# Altium PCB TiltPCB_CP1.PcbDoc
Units mm, origin at the board's own origin, x right, y up, seen from the top; angles counter-clockwise.
Board outline 82.66 x 56.61 mm, 2 copper layers (Top Layer, Bottom Layer); 75 components, 69 nets, 293 pads, 22 vias.
Unrouted connection lines stored in the file: 72.
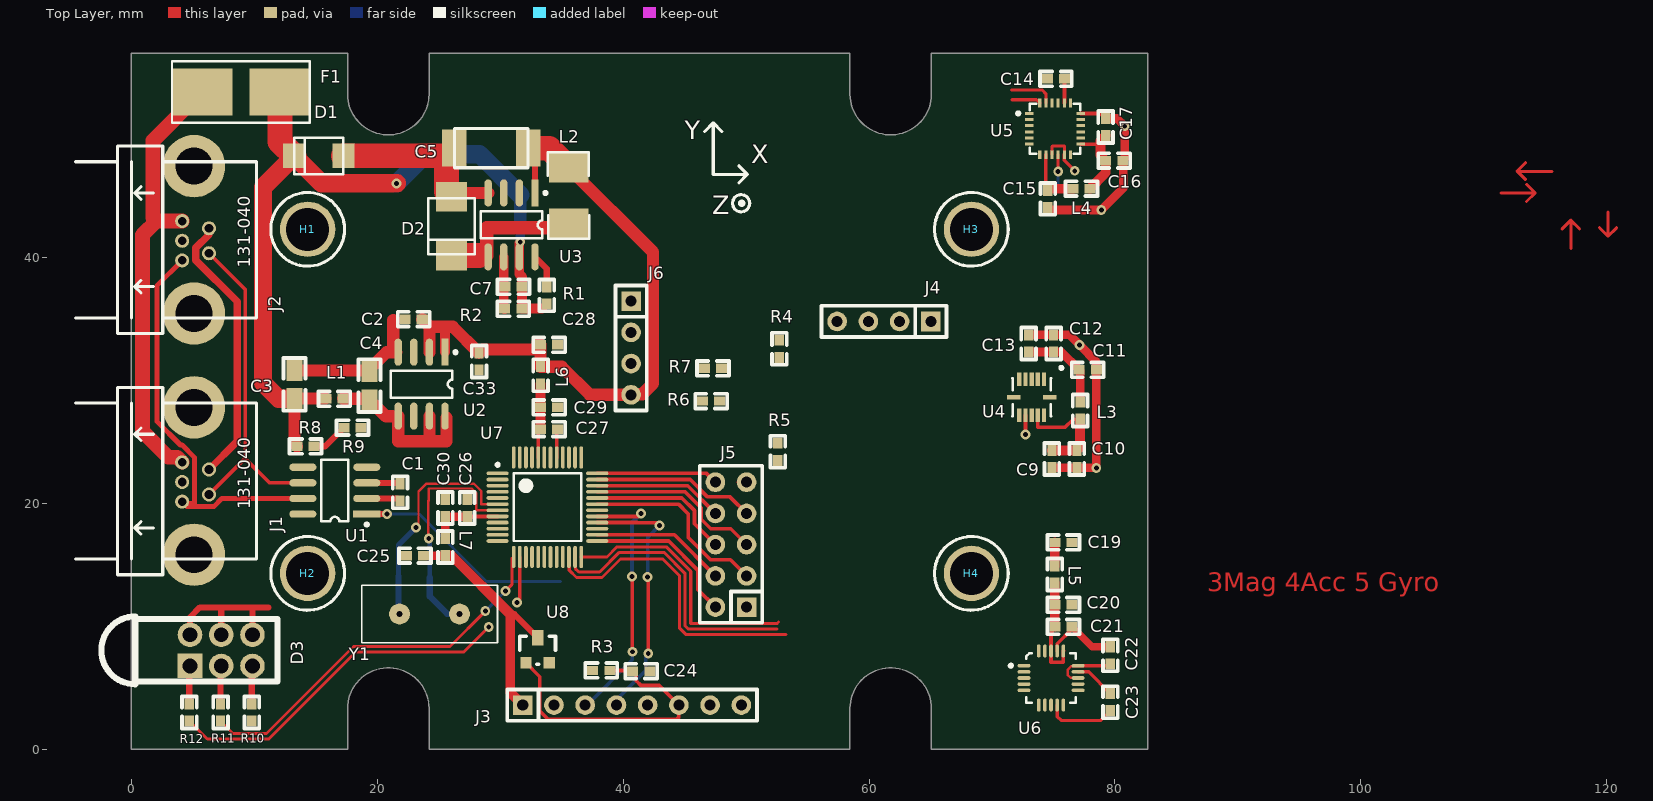
[diagram p0: Top Layer view]
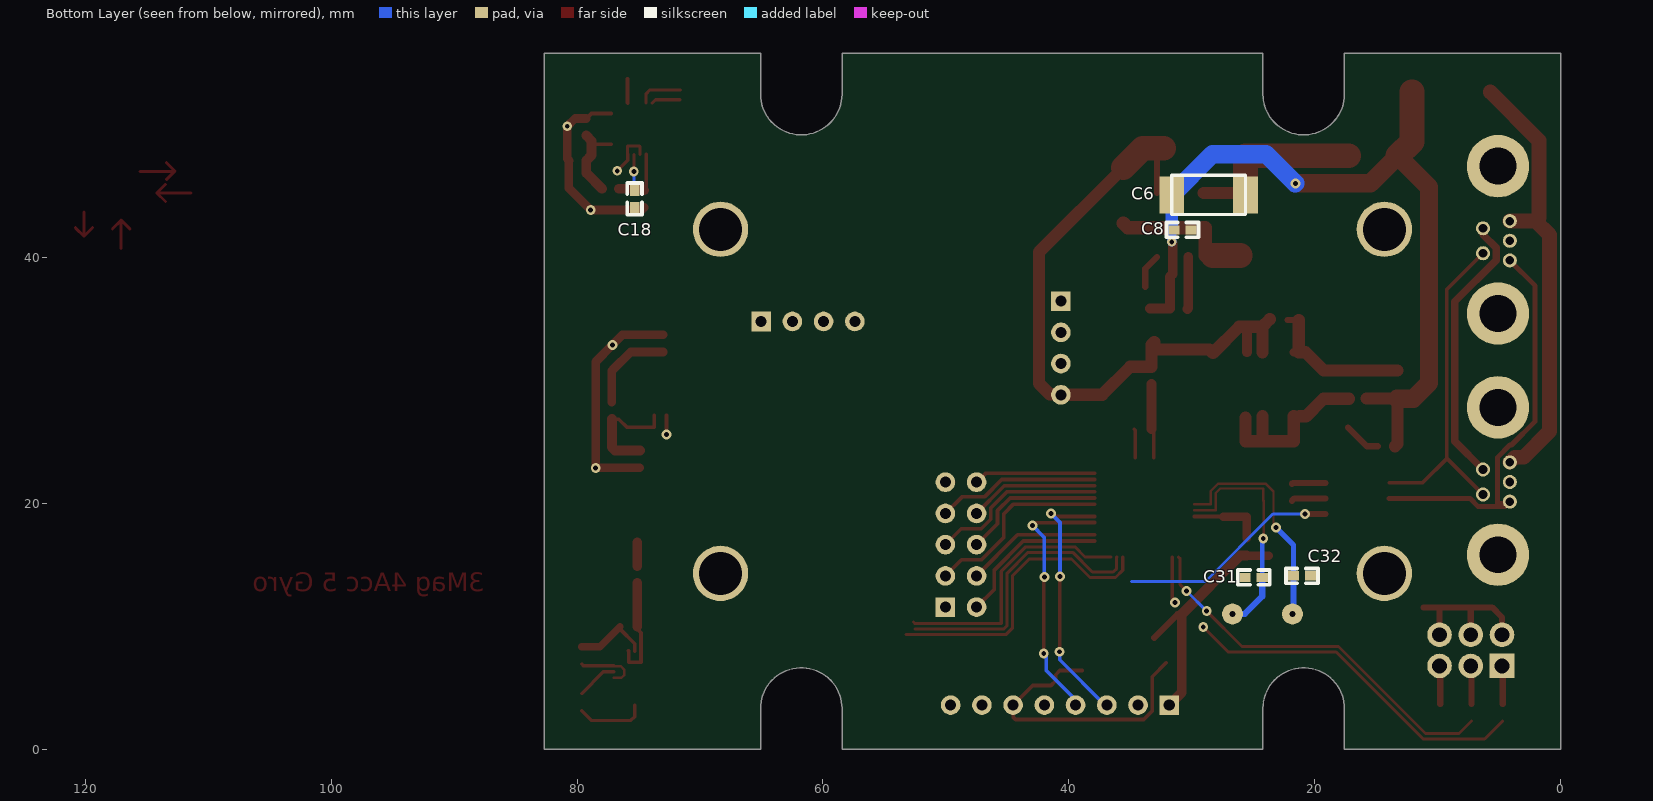
[diagram p1: Bottom Layer view, seen from below]

## Layer stack, top to bottom
Top Layer: signal copper 0.0356
Dielectric: dielectric 0.32, FR-4, Dk 4.8
Bottom Layer: signal copper 0.0356

## Board outline
17.575,0 17.575,3.31 cw(c20.89,3.31) 24.205,3.31 24.205,0 58.445,0 58.445,3.31 cw(c61.76,3.31) 65.075,3.31 65.075,0 65.08,-0.005 82.655,-0.005 82.655,56.605 82.65,56.6 65.075,56.6 65.075,53.29 cw(c61.76,53.29) 58.445,53.29 58.445,56.6 24.205,56.6 24.205,53.29 cw(c20.89,53.29) 17.575,53.29 17.575,56.605 -0.005,56.605 -0.005,-0.005 0,0

## Design rules (kind name [scope] priority, off if disabled: settings)
Clearance [All] p1: gap=0.2
HoleSize [All] p1 off: absolutevalues=TRUE maxlimit=5 minlimit=0.3 maxpercent=80.000 minpercent=20.000
PolygonConnect [All] p1: connectstyle=Relief reliefconductorwidth=0.254 reliefentries=4 polygonreliefangle="90 Angle"
RoutingVias [All] p1: holewidth=0.4 width=0.8 viastyle="Through Hole" minholewidth=0.4 minwidth=0.8 maxholewidth=0.4 maxwidth=0.8
SilkToSilkClearance [All] p1: silktosilkclearance=0.1
SilkscreenOverComponentPads [All] p1 off: minsilkscreentomaskgap=0.1
SolderMaskExpansion [All] p1: expansion=0.102
TestPointUsage [All] p1: valid=0 allowmultiple=FALSE
Testpoint [All] p1: side=15 testpointundercomponent=TRUE minsize=1.016 maxsize=2.54 preferedsize=1.524 minholesize=0 maxholesize=1.016 preferedholesize=0.813 testpointgrid=0.025 style=1023 order=0-112345678
Width [All] p1: maxlimit=10 minlimit=0.2 preferedwidth=0.254 minimp=50.000000 maximp=50.000000 favimp=50.000000
21 further rules are at their usual default settings.

## Classes and differential pairs
component class U_3V-Switcher-50mA: C5 C6 C7 C8 D2 L2 R1 R2 U3
component class TopLevel: D3 H1 H2 H3 H4 J4 J5 J6 R4 R5 R6 R7 R8 R9 R10 R11 R12
component class PWR: C1 C2 C3 C4 D1 F1 J1 J2 L1 U1 U2
component class LPC: C24 C25 C26 C27 C28 C29 C30 C31 C32 C33 J3 L6 L7 R3 U7 U8 Y1
component class AccGryro: C9 C10 C11 C12 C13 C14 C15 C16 C17 C18 C19 C20 C21 C22 C23 L3 L4 L5 U4 U5 U6

## Components (designator, comment, footprint, x,y, rotation, side; value= is the part's Value field where it differs from the comment)
C1 "100nF" 0603 21.844,20.193 r90 top
C2 "2.2u" 0603 22.25,34.976 r0 top
C3 "10u" 0805 13.259,28.524 r90 top
C4 "10u" 0805 19.355,28.423 r90 top
C5 "4u7 35V" MCCT-CASEC 32.258,48.895 r180 top
C6 "4u7 35V" MCCT-CASEC 31.623,45.085 r180 bottom
C7 "1n" 0603 31.775,37.617 r180 top
C8 "100nF" 0603 31.445,42.24 r180 bottom
C9 "10u" 0603 74.879,24.308 r270 top
C10 "0.1u" 0603 76.911,24.308 r270 top
C11 "1u" 0603 77.089,30.861 r0 top
C12 "100nF" 0603 75.006,32.309 r90 top
C13 "CAP" 0603 72.974,32.309 r90 top
C14 "2.2n 50V" 0603 75.895,54.534 r180 top
C15 "0.1u" 0603 74.549,45.466 r270 top
C16 "100nF" 0603 79.248,47.879 r0 top
C17 "10nF" 0603 79.248,49.911 r90 top
C18 "100n" 0603 75.311,45.466 r270 bottom
C19 "0.1u" 0603 75.108,16.815 r0 top
C20 "100nF" 0603 75.108,11.735 r0 top
C21 "10nF" 0603 75.108,9.957 r0 top
C22 "4.7u" 0603 79.629,6.934 r90 top
C23 "0.22u" 0603 79.629,4.521 r270 top
C24 "10nF" 0603 40.767,6.35 r0 top
C25 "1u" 0603 22.352,15.748 r0 top
C26 "10n" 0603 27.305,20.32 r270 top
C27 "10n" 0603 33.274,26.035 r0 top
C28 "1u" 0603 33.274,32.893 r0 top
C29 "100nF" 0603 33.274,27.813 r0 top
C30 "100nF" 0603 25.527,20.32 r270 top
C31 "18pF" 0603 24.257,13.97 r0 bottom
C32 "18pF" 0603 21.717,14.097 r180 bottom
C33 "100nF" 0603 28.27,32.233 r270 top
D1 "12V Transient Suppressor" SMA 15.24,48.26 r180 top
D2 "MBRS130" SMB 26.035,42.545 r270 top
D3 "1882-2781" LED_TRILEVEL 4.755,6.77 r90 top
F1 "125mA/3A" LITTELFUSE-154 8.89,53.467 r0 top
H1 "HOLE" M2.5 14.326,42.291 r0 top
H2 "HOLE" M2.5 14.326,14.3 r0 top
H3 "HOLE" M2.5 68.326,42.291 r0 top
H4 "HOLE" M2.5 68.326,14.3 r0 top
J1 "CON5-S" TRIAD5F 6.3,22.75 r90 top
J2 "CON5-S" TRIAD5F 6.3,42.375 r90 top
J3 "LPC SWD Connector" IDC8 31.826,3.581 r0 top
J4 "Generic_Header_4P" IDC4 65.024,34.798 r180 top
J5 "CON10" IDC10 50.038,11.557 r90 top
J6 "UART_Header" IDC4 40.64,36.449 r270 top
L1 "Ferrite" 0603 15.799,28.499 r0 top
L2 "330uH" 1812 35.56,42.799 r90 top
L3 "Ferrite" 0603 77.165,26.848 r90 top
L4 "Ferrite" 0603 76.581,45.593 r0 top
L5 "Ferrite" 0603 75.108,14.91 r270 top
L6 "Ferrite" 0603 33.274,29.718 r90 top
L7 "Ferrite" 0603 25.527,15.748 r90 top
R1 "100k" 0603 33.782,37.617 r270 top
R2 "1R2" 0603 31.75,35.814 r180 top
R3 "10k" 0603 38.913,6.401 r180 top
R4 "4K7" 0603 52.705,31.877 r90 top
R5 "4K7" 0603 52.578,24.892 r270 top
R6 "0R" 0603 46.457,28.321 r0 top
R7 "0R" 0603 46.609,30.988 r0 top
R8 "100K" 0603 14.859,24.638 r180 top
R9 "20K" 0603 18.669,26.162 r180 top
R10 "1K" 0603 9.779,3.683 r270 top
R11 "1K" 0603 7.239,3.683 r270 top
R12 "1K" 0603 4.699,3.683 r270 top
U1 "SN65HVD232" SO8 16.535,21.031 r90 top
U2 "MIC5200" SO8 23.597,29.693 r180 top
U3 "LTC1474" SO8 30.912,42.647 r180 top
U4 "BMA180" "LGA - BMA180" 73.228,28.626 r180 top
U5 "ITG-3200 Gyro" "ITG-3200 - QFN 24 Pin" 75.133,50.47 r0 top
U6 "HMC5843" "HMC5843 - LPCC 20 Pin" 74.803,5.791 r0 top
U7 "LPC11C14" TSQFP50P900X900-48N 33.833,19.685 r0 top
U8 "XC61CN2002MR" SOT23(3) 32.08,7.036 r0 top
Y1 "12 MHz" HC49/4H 18.72,10.998 r0 top

## Footprints (in the part's own frame and the unit in brackets; to place one, negate y for a bottom-side part, rotate by r counter-clockwise, add the part's x,y. Pads: shape width x height; smd on the part's side, far side on the other; paste and mask are expansions set on the pad)
0603 [mil]
  rect 35.43x30 smd: 1(0,0) 2(55,0)
  silkscreen extent -24,-24 79,24
0805 [mm]
  rect 1.7x1.27 smd: 1(0,0) 2(2.286,0)
  silkscreen extent -1,-0.9 3.3,0.9
1812 [mm]
  rect 2.4x3.2 smd: 1(0,0) 2(4.5,0)
  silkscreen extent -1.27,-1.66 5.77,1.7
HC49/4H [mm]
  round 1.7 hole 0.5: 1(3.085,0) 2(7.965,0)
  silkscreen extent 0,-2.35 11.05,2.35
"HMC5843 - LPCC 20 Pin" [mm] "HMC5843 - LPCC 20 Pin"
  oval 1.05x0.3 smd: 1(-2.2,1) 2(-2.2,0.5) 3(-2.2,0) 4(-2.2,-0.5) 5(-2.2,-1) 11(2.2,-1) 12(2.2,-0.5) 13(2.2,0) 14(2.2,0.5) 15(2.2,1)
  oval 0.3x1.05 smd: 6(-1,-2.2) 7(-0.5,-2.2) 8(0,-2.2) 9(0.5,-2.2) 10(1,-2.2) 16(1,2.2) 17(0.5,2.2) 18(0,2.2) 19(-0.5,2.2) 20(-1,2.2)
  silkscreen extent -3.4,-2 2,2, body extent -2,-2 2,2, height 1.46
IDC4 [mm]
  rect 1.6x1.6 hole 0.9: 1(0,0)
  round 1.6 hole 0.9: 2(2.54,0) 3(5.08,0) 4(7.62,0)
  silkscreen extent -1.27,-1.27 8.89,1.27
IDC8 [mm]
  rect 1.6x1.6 hole 0.9: 1(0,0)
  round 1.6 hole 0.9: 2(2.54,0) 3(5.08,0) 4(7.62,0) 5(10.16,0) 6(12.7,0) 7(15.24,0) 8(17.78,0)
  silkscreen extent -1.27,-1.27 19.05,1.27
IDC10 [mm]
  rect 1.6x1.6 hole 0.9: 1(0,0)
  round 1.6 hole 0.9: 2(0,2.54) 3(2.54,0) 4(2.54,2.54) 5(5.08,0) 6(5.08,2.54) 7(7.62,0) 8(7.62,2.54) 9(10.16,0) 10(10.16,2.54)
  silkscreen extent -1.27,-1.27 11.5,3.81
"ITG-3200 - QFN 24 Pin" [mm] "QFN, 24-Leads, Body 4.1x4.1mm (max), Pitch 0.50mm, IPC Low Density"
  rect 0.7x0.25 smd: 1(-2.1,1.25) 2(-2.1,0.75) 3(-2.1,0.25) 4(-2.1,-0.25) 5(-2.1,-0.75) 6(-2.1,-1.25) 13(2.1,-1.25) 14(2.1,-0.75) 15(2.1,-0.25) 16(2.1,0.25) 17(2.1,0.75) 18(2.1,1.25)
  rect 0.25x0.7 smd: 7(-1.25,-2.1) 8(-0.75,-2.1) 9(-0.25,-2.1) 10(0.25,-2.1) 11(0.75,-2.1) 12(1.25,-2.1) 19(1.25,2.1) 20(0.75,2.1) 21(0.25,2.1) 22(-0.25,2.1) 23(-0.75,2.1) 24(-1.25,2.1)
  silkscreen extent -3.12,-2.05 2.05,2.05, body extent -2.05,-2.05 2.05,2.05, height 0.95
LED_TRILEVEL [mm]
  rect 2x2 hole 1.2: 1(0,0)
  round 2 hole 1.2: 2(0,-2.54) 3(0,-5.08) 4(2.54,-5.08) 5(2.54,-2.54) 6(2.54,0)
  silkscreen extent -1.49,-7.11 4.03,7.21
"LGA - BMA180" [mm] "LCC, 12-Pins, Body 3.1x3.1mm (max), Pitch 0.50mm, IPC High Density"
  rect 0.35x1.1 smd: 1(-1,-1.475) 2(-0.5,-1.475) 3(0,-1.475) 4(0.5,-1.475) 5(1,-1.475) 7(1,1.475) 8(0.5,1.475) 9(0,1.475) 10(-0.5,1.475) 11(-1,1.475)
  rect 1.1x0.35 smd: 6(1.475,0) 12(-1.475,0)
  silkscreen extent -2.54,-2.51 1.57,1.56, body extent -1.51,-1.5 1.5,1.51, height 1
LITTELFUSE-154 [mm]
  rect 5x3.81 smd: 1(-3.185,0) 2(3.185,0)
  silkscreen extent -5.6,-2.51 5.6,2.5
M2.5 [mm]
  round 4.5 hole 3.5: 1(0,0)
  silkscreen extent -3,-3 3,3
MCCT-CASEC [mm]
  rect 2x3 smd: 1(0,0) 2(6,0)
  silkscreen extent 0,-1.6 6,1.6
SMA [mm]
  rect 1.8x2 smd: A(-2,0) K(2,0)
  silkscreen extent -2,-1.48 2,1.48
SMB [mm]
  rect 2.4x2.5 smd: A(-2.385,0) K(2.385,0)
  silkscreen extent -2.28,-1.9 2.3,1.9
SO8 [mm]
  rect 0.6x2.2 smd: 1(-1.905,-2.6)
  oval 0.6x2.2 smd: 2(-0.635,-2.6) 3(0.635,-2.6) 4(1.905,-2.6) 5(1.905,2.6) 6(0.635,2.6) 7(-0.635,2.6) 8(-1.905,2.6)
  silkscreen extent -2.88,-2.72 2.5,1.1
SOT23(3) [mil]
  rect 36x36 smd: 1(0,0) 2(75,0)
  rect 36x50 smd: 3(38,80)
  silkscreen extent -20,-5 95,85
TRIAD5F [mil]
  round 200 hole 118.11: 0(-273,48) 0(199,48)
  round 45 hole 27.56: 1(0,0) 2(23,86) 3(-40,86) 4(-103,86) 5(-80,0)
  silkscreen extent -337,-152 263,428
TSQFP50P900X900-48N [mm] "Thin QFP, 48-Leads, Body 7x7mm, Pitch 0.5mm, IPC Medium Density"
  oval 1.8x0.3 smd: 1(-4.05,2.75) 2(-4.05,2.25) 3(-4.05,1.75) 4(-4.05,1.25) 5(-4.05,0.75) 6(-4.05,0.25) 7(-4.05,-0.25) 8(-4.05,-0.75) 9(-4.05,-1.25) 10(-4.05,-1.75) 11(-4.05,-2.25) 12(-4.05,-2.75) 25(4.05,-2.75) 26(4.05,-2.25) 27(4.05,-1.75) 28(4.05,-1.25) 29(4.05,-0.75) 30(4.05,-0.25) 31(4.05,0.25) 32(4.05,0.75) 33(4.05,1.25) 34(4.05,1.75) 35(4.05,2.25) 36(4.05,2.75)
  oval 0.3x1.8 smd: 13(-2.75,-4.05) 14(-2.25,-4.05) 15(-1.75,-4.05) 16(-1.25,-4.05) 17(-0.75,-4.05) 18(-0.25,-4.05) 19(0.25,-4.05) 20(0.75,-4.05) 21(1.25,-4.05) 22(1.75,-4.05) 23(2.25,-4.05) 24(2.75,-4.05) 37(2.75,4.05) 38(2.25,4.05) 39(1.75,4.05) 40(1.25,4.05) 41(0.75,4.05) 42(0.25,4.05) 43(-0.25,4.05) 44(-0.75,4.05) 45(-1.25,4.05) 46(-1.75,4.05) 47(-2.25,4.05) 48(-2.75,4.05)
  silkscreen extent -4.17,-2.75 2.75,3.57, body extent -3.5,-3.5 3.5,3.5, height 1.6

## Part data
C1 C2 C3 C4 C7 C8 C9 C10 C11 C12 C14 C15 C16 C17 C18 C19 C20 C21 C22 C23 C24 C25 C26 C27 C28 C29 C30 C31 C32 C33: library part CAP, "Capacitor"
C5 C6: library part "Cap Pol3", "Polarized Capacitor (Surface Mount)"
C13: "Capacitor"
D1: library part DIODE, "Diode"
D2: library part "D SCHOTTKY", "Schottky Diode"
D3: library part LED-TRILEVEL, "Three level LED"
F1: library part FUSE2, "Fuse"
H1 H2 H3 H4: "Hole"
J1 J2: "Connector, 2 pin, with shield @ S"
J3: library part LPCLink_Connector
J5: "10 pin, right angle, ribbon con with claws"
L1 L3 L4 L5 L6 L7: library part INDUCTOR, "Inductor"
L2: library part Inductor, "Inductor"
R1 R2 R3 R4 R5 R6 R7 R8 R9 R10 R11 R12: library part RES1, "Resistor"
U1: "3.3V CAN Transciever"
U2: "MIC5200 - SO8"
U3: "Step-down converter"
U5: library part ITG-3200
U7: library part LPC11C14_Full
U8: library part XC61F, "SOT23 reset generator"
Y1: library part CRYSTAL, "Crystal"

## Via types
v1: diameter 0.8, hole 0.4, Top Layer to Bottom Layer, 22 vias

## Nets (pads, with @x,y where several pads share a name; then routed paths per layer and width w, separated by ;. In a path a pad name is that pad's centre, name@x,y a point inside that pad or via, vN(x,y) a via of type N, cw(c..) or ccw(c..) an arc to the next point about the centre after c; other vN are vias at no path point)
3V3: C1.2 C2.2 C5.1 C9.1 C10.1 C15.1 C19.1 C25.2 C28.1 C33.1 D3.4 D3.5 D3.6 J3.1 J4.4 J5.9 J6.4 L2.2 L3.1 L4.1 L5.1 L6.2 L7.1 R3.2 R4.2 R5.2 U1.3 U2.1 U2.2 U3.1 U4.10 U5.8 U8.3 | length 108.3
  Top Layer w0.253: J5.9@49.352,21.717 J5.9
  Top Layer w0.3: U4.10 73.728,26.205 73.711,26.187 75.946,26.187 76.606,26.848 L3.1 ; U5.8 74.383,45.632 C15.1
  Top Layer w0.5: D3.6 4.755,10.724 5.563,11.532 11.151,11.532 ; D3.5 7.295,11.511 ; D3.4 9.835,11.486 ; U1.3 21.768,21.666 C1.2 ; 30.81,10.973 31.14,10.973 U8.3 ; C5.1 32.817,48.336 U3.1
  Top Layer w0.7: C25.2 L7.1
  Top Layer w0.8: 25.476,34.366 25.502,34.341 U2.1 ; L7.1 26.035,15.748 30.81,10.973 30.81,4.597 J3.1 ; J6.4@40.589,28.88 J6.4 ; C15.1 74.676,45.593 L4.1 ; C9.1 C10.1 77.165,24.562 L3.1 ; L5.1 C19.1
  Top Layer w1: C2.2 24.232,34.392 ; U2.2 24.232,34.392 ; C28.1@33.045,33.122 C28.1 ; L2.2 42.418,40.441 42.418,29.743 41.554,28.88 40.589,28.88 40.538,28.829 37.287,28.829 35.001,31.115 L6.2 C28.1 ; 24.232,34.392 24.257,34.366 25.476,34.366 26.137,34.366 C33.1 28.55,32.512 32.893,32.512 C28.1
  Top Layer w2: C5.1 33.964,48.895 L2.2
12V_MEASURE: R8.1 R9.2 U7.30 | length 3
  Top Layer w0.5: R8.1 15.748,24.638 R9.2
/RESET: C24.1 J3.6 R3.1 U7.3 U8.1 | length 24.1
  Top Layer w0.3: U8.1 33.216,5.9 33.216,3.105 33.908,2.413 44.323,2.413 44.526,2.616 J3.6 42.926,5.182 41.453,5.182 41.059,5.575 41.059,6.058 C24.1 40.716,6.401 R3.1
ACCPWR: C11.1 C12.1 C13.1 L3.2 U4.2 U4.5 | length 7.4
  Top Layer w0.7: C13.1 C12.1 75.641,32.309 C11.1 77.165,30.785 L3.2
CAN+5V: J1.1 J2.1 | length 22.4
  Top Layer w0.6: J1.1 8.587,25.037 8.587,36.422 5.229,39.78 5.229,40.787 6.3,41.858 J2.1
CAN+12V: C3.1 C6.1 C7.1 C8.1 D1.K F1.2 L1.1 R1.2 R2.1 R8.2 U3.7 | length 67.5
  Top Layer w0.8: v1(31.623,41.275) 31.547,41.199 U3.7 31.547,38.659 31.775,38.43 C7.1 31.775,37.465 31.775,36.678 31.775,35.839 R1.2@33.401,35.839
  Top Layer w1: R8.2 13.259,24.841 C3.1 L1.1@15.773,28.524
  Top Layer w1.5: C3.1 11.963,28.524 10.693,29.794 10.693,45.713 D1.K 15.475,46.025 v1(21.565,46.025)
  Top Layer w2: F1.2 12.075,49.425 D1.K
  Bottom Layer w0.8: v1(31.623,41.275) C8.1@31.623,42.418
  Bottom Layer w1: C8.1@31.623,42.418 C6.1
  Bottom Layer w1.5: v1(21.565,46.025) 23.952,48.412 28.296,48.412 C6.1
CAN_H: J1.4 J2.4 U1.7 | length 32.9
  Top Layer w0.4: J2.4 2.057,37.701 2.057,26.67 3.979,24.749 4.115,24.749 5.116,23.748 5.116,20 4.249,20 4.514,19.736 6.692,19.736 7.352,20.396 12.344,20.396 U1.7
CAN_L: J1.5 J2.5 U1.6 | length 27.6
  Top Layer w0.3: J1.5 9.237,23.655 ; J2.5 9.237,37.406 9.237,23.655 ; U1.6 11.226,21.666 9.237,23.655
CANGND: C1.1 C2.1 C3.2 C4.2 C5.2 C6.2 C8.2 C9.2 C10.2 C11.2 C12.2 C13.2 C14.2 C15.2 C16.2 C17.2 C18.2 C19.2 C20.2 C21.2 C22.2 C24.2 C25.1 C26.1 C27.2 C28.2 C29.2 C30.1 C31.2 C32.2 C33.2 D1.A D2.A J1.3 J2.3 J3.8 J4.1 J5.1 J6.1 R9.1 R10.2 U1.2 U2.4 U3.4 U4.3 U4.8 U5.1 U5.9 U5.11 U5.18 U6.12 U6.17 U7.5 U7.41 U8.2 | length 79
  Top Layer w0.25: U5.9 74.883,49.043 74.913,49.073 75.895,49.073 75.895,48.382 U5.11
  Top Layer w0.3: U7.41 34.583,25.947 C27.2 ; v1(72.728,25.595) U4.8 ; U6.17 75.303,8.573 76.505,9.775 C21.2 ; U5.11 75.883,47.9 v1(76.733,47.05) ; U5.18 78.836,51.72 C17.2
  Top Layer w0.5: U1.2 21.641,20.396 C1.1 ; 21.301,34.916 C2.1@22.19,34.916
  Top Layer w0.6: C21.2 78.13,8.331 C22.2
  Top Layer w0.7: 21.301,32.293 U2.4 ; C13.2 C12.2 76.302,33.706 v1(77.114,32.893) 78.486,31.521 C11.2 v1(78.486,22.885) C9.2@74.905,22.885 ; C15.2 74.752,43.866 v1(78.892,43.866) 80.67,45.644 80.67,47.854 C16.2 80.797,48.031 v1(80.797,50.673) 80.162,51.308 C17.2
  Top Layer w1: C3.2 19.253,30.81 20.736,32.293 21.301,32.293 21.301,34.916 ; D2.A@25.728,45.237 28.998,45.237 U3.4
  Top Layer w2: D1.A 25.623,48.26 25.623,45.342 D2.A@25.728,45.237
GYROPWR: C16.1 C17.1 L4.2 U5.13 | length 7.2
  Top Layer w0.3: U5.13 78.684,49.22
  Top Layer w0.8: L4.2 79.248,46.863 C16.1 ; C16.1@78.892,48.235 C16.1 ; C17.1 78.816,49.479 78.816,48.311 C16.1
I2C_SCL: J4.2 R5.1 R6.2 U4.7 U5.23 U6.1 | length 3.7
  Top Layer w0.25: 71.603,53.619 74.092,53.619 74.383,53.328 U5.23
I2C_SDA: J4.3 R4.1 R7.2 U4.9 U5.24 U6.20 | length 2.4
  Top Layer w0.25: 71.628,52.832 73.621,52.832 U5.24
MAGPWR: C20.1 C21.1 L5.2 U6.16 U6.18 | length 8.6
  Top Layer w0.25: U6.16@75.778,7.966 U6.16
  Top Layer w0.3: C21.1@75.108,9.767 74.803,9.463 U6.18 74.803,7.061 75.794,7.061 75.803,7.071 U6.16 U6.16@75.819,8.007
  Top Layer w0.4: C21.1@75.108,9.767 C21.1
  Top Layer w0.8: C21.1 C20.1 L5.2
NetC4_1: C4.1 L1.2 U2.5 U2.7 U2.8 | length 15
  Top Layer w0.5: 21.234,27.076 U2.5@21.675,27.076
  Top Layer w1: L1.2 19.279,28.499 C4.1 20.701,27.076 21.234,27.076 ; U2.5 21.692,25.044 24.257,25.044 ; U2.7 24.232,25.07 24.257,25.044 ; U2.8@25.629,26.966 25.629,25.044 24.257,25.044
NetC7_2: C7.2 R2.2 U3.6 | length 4.3
  Top Layer w0.8: U3.6 30.277,35.89 R2.2
NetC14_1: C14.1 U5.20 | length 2
  Top Layer w0.3: U5.20 75.895,52.582 75.895,53.264 ; C14.1 75.895,53.264 ; 75.901,53.27 75.895,53.264
NetC18_1: C18.1 U5.10 | length 2.9
  Top Layer w0.25: v1(75.383,46.994) U5.10
  Bottom Layer w0.25: C18.1 75.383,45.538 v1(75.383,46.994)
NetC22_1: C22.1 U6.13 U6.15 | length 5
  Top Layer w0.2: U6.13 76.403,5.791 76.178,6.016 76.178,6.478 76.442,6.741 76.953,6.741 U6.15
  Top Layer w0.27: U6.15 79.486,6.791 C22.1
NetC23_1: C23.1 U6.14 | length 3.4
  Top Layer w0.27: U6.14 77.859,6.291 C23.1
NetC23_2: C23.2 U6.9 | length 5.7
  Top Layer w0.27: U6.9 75.303,2.65 75.616,2.337 78.842,2.337 C23.2
NetC26_2: C26.2 C30.2 L7.2 U7.8 | length 6
  Top Layer w0.254: U7.8@29.771,18.923 U7.8
  Top Layer w0.3: C26.2@27.432,18.923 27.444,18.935 U7.8@29.771,18.935
  Top Layer w0.7: L7.2 C30.2 C26.2@27.432,18.923
NetC27_1: C27.1 C29.1 L6.1 U7.44 | length 6.1
  Top Layer w0.3: U7.44 33.083,25.844 C27.1
  Top Layer w0.8: C27.1 C29.1 L6.1
NetD2_K: D2.K L2.1 U3.5 | length 11.9
  Top Layer w1: 28.293,40.16 U3.5@28.893,40.16
  Top Layer w1.1: U3.5@28.893,40.16 28.893,42.43 35.191,42.43 L2.1
  Top Layer w2: D2.K 28.293,40.16
NetD3_1: D3.1 R12.1 | length 3
  Top Layer w0.5: R12.1 D3.1@4.699,6.714
NetD3_2: D3.2 R11.1 | length 3.1
  Top Layer w0.5: R11.1 7.239,6.714 D3.2
NetD3_3: D3.3 R10.1 | length 3.1
  Top Layer w0.5: R10.1 9.779,6.714 D3.3
NetF1_1: F1.1 J1.2 J2.2 | length 36.2
  Top Layer w1.2: J1.2 3.701,23.749 2.997,23.749 0.889,25.857 0.889,41.834 2.014,42.959 ; J2.2 2.014,42.959 ; F1.1 1.753,49.515 1.753,48.825 1.741,48.813 1.741,43.233 2.014,42.959
NetJ5_2: J5.2 U7.25 | length 12.8
  Top Layer w0.3: U7.25 43.695,16.935 46.05,14.58 46.05,13.005 J5.2
NetJ5_3: J5.3 U7.31 | length 15.7
  Top Layer w0.3: U7.31 44.487,19.935 45.296,19.126 45.296,17.212 47.091,15.418 48.717,15.418 J5.3
NetJ5_4: J5.4 U7.26 | length 11
  Top Layer w0.3: U7.26 44.16,17.435 J5.4
NetJ5_5: J5.5 U7.33 | length 14.5
  Top Layer w0.3: U7.33 45.033,20.935 46.348,19.62 46.348,18.701 47.116,17.932 48.743,17.932 J5.5
NetJ5_6: J5.6 U7.32 | length 11.9
  Top Layer w0.21: J5.6 J5.6@47.498,16.764
  Top Layer w0.3: U7.32 44.767,20.435 45.796,19.406 45.796,18.339 J5.6
NetJ5_7: J5.7 U7.35 | length 13.3
  Top Layer w0.3: U7.35 45.451,21.935 46.863,20.523 48.692,20.523 J5.7
NetJ5_8: J5.8 U7.34 | length 10.6
  Top Layer w0.3: U7.34 45.24,21.435 J5.8
NetJ5_10: J5.10 U7.36 | length 9.9
  Top Layer w0.3: U7.36 46.78,22.435 J5.10
NetJ6_2: J6.2 U7.47
NetJ6_3: J6.3 U7.46
NetR1_1: R1.1 U3.8 | length 2.8
  Top Layer w0.5: U3.8 33.782,39.081 R1.1
NetR6_1: R6.1 U7.15
NetR7_1: R7.1 U7.16
NetU1_1: U1.1 U7.20 | length 18
  Top Layer w0.5: U1.1 v1(20.777,19.126)
  Bottom Layer w0.25: v1(20.777,19.126) 23.393,19.126 28.88,13.64 34.874,13.64
NetU1_4: U1.4 U7.19
NetU4_4: U4.4 U7.23 | length 23.2
  Top Layer w0.25: U7.23 36.108,15.61 36.108,14.688 36.386,14.41 38.084,14.41 39.683,16.009 43.312,16.009 45.041,14.28 45.041,10.024 45.305,9.761 52.502,9.761
NetU5_12: U5.12 U7.24 | length 21.5
  Top Layer w0.25: U7.24 38.673,15.635 39.497,16.459 43.499,16.459 45.491,14.467 45.491,10.211 52.502,10.211 52.629,10.338
NetU6_19: U6.19 U7.22 | length 24.7
  Top Layer w0.25: U7.22 35.608,15.61 35.608,14.552 36.2,13.96 38.271,13.96 39.779,15.469 43.217,15.469 44.591,14.094 44.591,9.838 45.119,9.311 53.253,9.311
NetU7_1: U7.1
NetU7_2: U7.2
NetU7_4: U7.4
NetU7_9: U7.9
NetU7_10: U7.10
NetU7_11: U7.11
NetU7_12: U7.12
NetU7_17: U7.17
NetU7_18: U7.18
NetU7_21: U7.21
NetU7_37: U7.37
NetU7_38: U7.38
NetU7_40: U7.40
NetU7_42: U7.42
NetU7_43: U7.43
NetU7_45: U7.45
NetU7_48: U7.48
REDLED: R12.2 U7.14 | length 32.8
  Top Layer w0.25: R12.2 6.165,0.82 11.159,0.82 18.246,7.907 27.033,7.907 v1(29.058,9.931) ; v1(31.344,11.938) 31.583,12.177 U7.14
  Bottom Layer w0.25: v1(29.058,9.931) v1@29.337,9.931
TCLK: J3.3 U7.29 | length 21.3
  Top Layer w0.3: U7.29 41.211,18.935 v1(41.453,19.177) ; v1(40.716,14.046) 40.742,14.021 v1(40.742,7.925)
  Bottom Layer w0.3: J3.3 37.059,3.581 40.742,7.264 v1(40.742,7.925) ; v1(40.716,14.046) 40.716,18.44 v1(41.453,19.177)
TDO: J3.4 U7.28 | length 21.5
  Top Layer w0.3: U7.28 41.134,18.435 ; 41.142,18.427 42.711,18.427 v1(42.951,18.186) ; v1(41.986,13.995) 42.037,13.945 42.037,9.322 v1(42.037,7.772)
  Bottom Layer w0.3: J3.4 39.446,4.013 41.834,6.401 41.834,7.569 v1(42.037,7.772) ; v1@41.783,14.199 v1(41.986,13.995) 41.986,17.221 v1(42.951,18.186)
TMS: J3.2 U7.39
XTALIN: C32.1 U7.6 Y1.1 | length 19.4
  Top Layer w0.2: v1(23.139,18.034) 23.343,18.237 23.343,20.954 23.994,21.605 27.841,21.605 28.467,20.979 28.467,19.935 U7.6 U7.6@28.962,19.935
  Bottom Layer w0.4: C32.1 21.717,16.612 v1(23.139,18.034)
  Bottom Layer w0.5: Y1.1@21.717,11.086 C32.1
XTALOUT: C31.1 U7.7 Y1.2 | length 20.1
  Top Layer w0.2: v1@24.333,16.993 v1(24.181,17.145) 24.155,17.17 24.155,20.204 24.159,20.208 24.159,21.205 27.675,21.205 28.046,20.835 28.046,19.435 U7.7 U7.7@28.896,19.435
  Bottom Layer w0.4: v1(24.181,17.145) 24.257,17.069 C31.1
  Bottom Layer w0.5: C31.1 24.257,12.421 25.679,10.998 Y1.2
YELLED: R11.2 U7.13 | length 31.4
  Top Layer w0.25: R11.2 8.255,1.27 10.973,1.27 18.059,8.357 25.908,8.357 v1(28.778,11.227) ; v1(30.421,12.869) 30.937,13.386 30.937,15.489 U7.13
  Bottom Layer w0.25: v1(28.778,11.227) v1(30.421,12.869)
pads on no net: H1.1 H2.1 H3.1 H4.1 J1.0 J2.0 J3.5 J3.7 U1.5 U1.8 U2.3 U2.6 U3.2 U3.3 U4.1 U4.6 U4.11 U4.12 U5.2 U5.3 U5.4 U5.5 U5.6 U5.7 U5.14 U5.15 U5.16 U5.17 U5.19 U5.21 U5.22 U6.2 U6.3 U6.4 U6.5 U6.6 U6.7 U6.8 U6.10 U6.11 U7.27
copper on no net: | length 17.7
  Top Layer w0.254: 111.404,45.237 114.186,45.25 ; 112.712,47.028 113.411,47.727 ; 113.411,46.33 112.769,46.972 112.781,47.003 115.557,47.003 ; 113.487,44.552 114.186,45.25 ; 113.487,45.949 114.186,45.25 ; 116.395,42.329 117.094,43.028 ; 117.094,40.716 117.094,43.028 ; 117.792,42.329 117.094,43.028 ; 119.418,42.431 120.117,41.732 ; 120.117,43.702 120.117,41.732 ; 120.815,42.431 120.117,41.732

## Other copper
Top Layer:
  text "1LPC 2SWITCH" at 27.356,61.392 h1.52
  text "3Mag 4Acc 5 Gyro" at 87.503,12.827 h1.52

## Silkscreen, mask and mechanical layers (free items; w line width, h text height)
Top Overlay:
  circle w0.3: c49.634,44.411 r0.15
  circle w0.254: c49.592,44.411 r0.7
  lines w0.254: 46.622,50.254 47.32,50.952 ; 48.019,50.254 47.32,50.952 ; 49.403,46.063 50.102,46.761 ; 49.403,47.46 50.102,46.761 ; 47.32,50.952 47.32,46.761 50.102,46.761
  text "Y" at 45.009,49.606 h1.52
  text "X" at 50.394,47.676 h1.52
  text "Z" at 47.244,43.522 h1.52
Mechanical 1:
  circle w0.254: c14.325,42.3 r1.602
  circle w0.254: c68.325,42.3 r1.602
  circle w0.254: c68.325,14.3 r1.602
  circle w0.254: c14.325,14.3 r1.602
  lines w0.254: -0.005,-0.005 -0.005,56.605 17.575,56.605 17.575,53.295 ; 0,0 17.575,0 17.575,3.31 cw(c20.89,3.31) 24.205,3.31 24.205,0 58.445,0 58.445,3.31 cw(c61.76,3.31) 65.075,3.31 65.075,0 ; 0.376,10.739 12.009,10.739 ; 0.554,5.329 11.933,5.329 ; 7.818,28.214 10.231,28.214 10.231,15.387 7.92,15.387 ; 7.818,47.849 10.231,47.849 10.231,35.022 7.92,35.022 ; 17.575,53.29 ccw(c20.89,53.29) 24.205,53.29 24.205,56.6 58.445,56.6 58.445,53.29 ccw(c61.76,53.29) 65.075,53.29 65.075,56.6 82.65,56.6 ; 65.08,-0.005 82.655,-0.005 82.655,56.605
  text "Hole = 3.5mm" at 12.167,63.754 h1
  text "Press q to toggle mil and mm" at -48.621,51.201 h1
  text "CAN_2 Placement" at -25.005,43.048 h1
  text "X 6.300mm" at -25.005,40.457 h1
  text "Y 42.375mm" at -25.005,37.79 h1
  text "CAN_1 Placement" at -25.005,23.338 h1
  text "X 6.300mm" at -25.005,20.747 h1
  text "Y 22.750mm" at -25.005,18.08 h1
  text "LED Placement" at -25.005,9.52 h1
  text "X 4.755mm" at -25.005,6.929 h1
  text "Y 6.770mm" at -25.005,4.262 h1

## Text inside footprints (layer, text, board x,y; h text height)
J1: Top Overlay "131-040" at 9.653,19.524 h1 r90
J2: Top Overlay "131-040" at 9.653,39.149 h1 r90